# Altium PCB uku20710_com.PcbDoc (part 4 of 4)
Units mm, origin at the board's own origin, x right, y up, seen from the top; angles counter-clockwise.
Board outline 354.7 x 156.7 mm, 2 copper layers (Top Layer, Bottom Layer); 275 components, 514 nets, 980 pads, 578 vias.
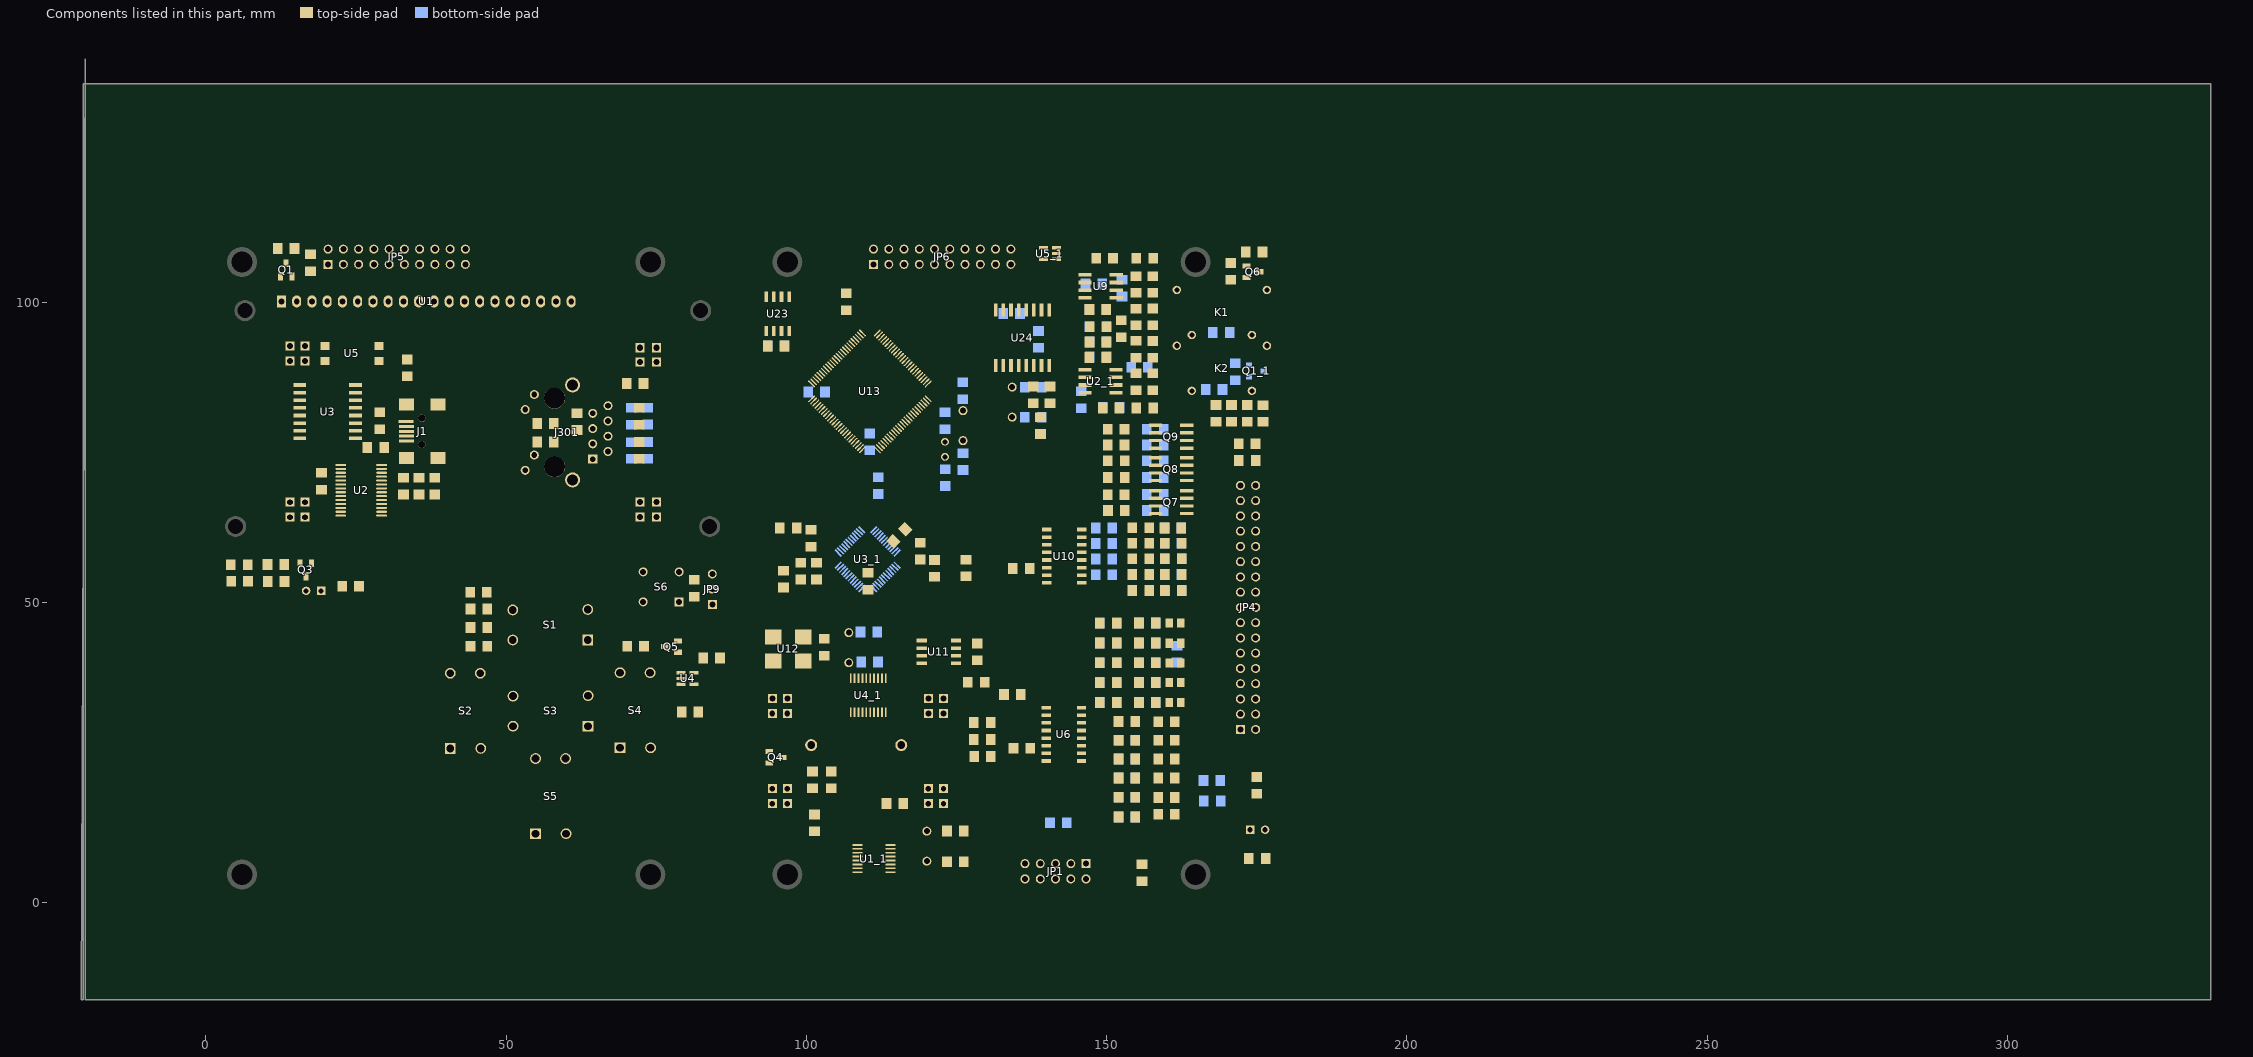
[diagram p4: the components of this part, seen from the top]

## Via types
v1: diameter 1.1, hole 0.6, Top Layer to Bottom Layer, 491 vias
v2: diameter 1.2, hole 0.7, Top Layer to Bottom Layer, 63 vias
v3: diameter 1.5, hole 1, Top Layer to Bottom Layer, 20 vias
v4: diameter 1.27, hole 0.7, Top Layer to Bottom Layer, 3 vias
v5: diameter 1.2, hole 0.6, Top Layer to Bottom Layer, 1 vias

## Nets (pads, with @x,y where several pads share a name; then routed paths per layer and width w, separated by ;. In a path a pad name is that pad's centre, name@x,y a point inside that pad or via, vN(x,y) a via of type N, cw(c..) or ccw(c..) an arc to the next point about the centre after c; other vN are vias at no path point) (continued)
copper on no net: (continued)
  Bottom Layer w0.4: v1@92.447,102.727 92.497,102.727 92.497,102.377 93.473,101.401 98.274,101.401 99.574,102.701 107.424,102.701 108.174,103.451 110.474,103.451 113.324,106.301 113.714,106.301 ; v1(99.275,24.006) 98.825,24.456 98.825,28.857 99.675,29.707 99.675,38.06 v1(99.625,38.11) ; v1(111.078,16.504) v1@111.178,16.604 ; v1@111.178,9.953 111.178,26.757 112.878,28.457 v1(112.878,29.907) ; 123.118,69.389 124.7,69.389 124.972,69.117 124.972,67.427 126.882,65.516 126.882,63.416 126.682,63.216 v1(126.682,59.465) ; v1(126.656,40.761) 127.806,41.912 127.806,43.962 127.506,44.262 127.506,48.763 v1(127.806,49.063) ; v1(126.706,42.762) v1(126.706,50.364) ; v1(130.074,90.201) 141.274,90.201 ; v1(130.724,80.551) 132.874,78.401 132.874,70.519 133.008,70.386 133.008,69.268 132.874,69.135 132.874,63.351 133.374,62.851 133.374,53.831 133.308,53.765 133.308,50.981 133.374,50.914 133.374,44.851 133.824,44.401 133.824,19.901 133.724,19.801 133.724,13.853 137.659,9.919 137.659,5.243 138.941,3.961 ; v1@133.924,64.951 134.274,64.601 134.274,58.903 133.978,58.606 133.978,56.975 134.274,56.679 134.274,53.751 133.948,53.424 133.948,51.424 134.274,51.097 134.274,45.201 134.724,44.751 134.724,22.651 134.574,22.501 134.574,20.801 134.824,20.551 v1(134.824,17.751) ; v1@134.024,66.951 v1(134.074,66.951) 134.074,66.401 134.974,65.501 134.974,58.782 134.558,58.366 134.558,57.215 134.974,56.799 134.974,53.63 134.528,53.184 134.528,51.844 134.974,51.398 134.974,45.651 135.424,45.201 135.424,22.051 v1(135.574,21.901) ; v1@135.974,66.351 136.074,66.251 136.074,59.05 136.808,58.316 136.808,57.315 136.074,56.581 v1@136.074,52.564 ; v1(136.074,68.651) 136.074,70.901 135.774,71.201 135.774,73.251 136.574,74.051 v1(136.574,79.001) ; v1(136.674,105.601) 144.874,105.601 145.424,105.051 152.412,105.051 ; v1@137.324,48.201 v1(137.824,48.201) ; 137.359,53.214 v1(138.259,53.214) ; 138.662,95.207 140.091,95.207 140.384,95.5 ; v1@140.359,96.625 140.359,96.601 140.359,95.525 140.384,95.5 ; 140.409,95.525 140.384,95.5 ; v1@140.424,96.601 140.424,97.151 ; 141.274,90.151 141.324,90.151 142.174,89.301 152.012,89.301 154.024,89.301 154.074,89.251 ; v1@141.674,91.951 141.81,92.086 141.81,94.075 140.384,95.5 ; v1(141.724,47.001) v1(141.724,54.5) ; v1(142.11,28.458) 142.11,27.408 142.81,26.708 142.81,20.887 v1(142.724,20.801) ; v1(142.874,52.714) 142.874,55.78 v1(142.91,55.815) ; v1(143.724,100.851) 144.235,100.851 146.361,102.977 ; v1@145.261,95.925 147.122,95.904 147.722,95.904 ; v1(145.311,93.358) 145.327,93.375 147.172,93.375 147.211,93.375 ; v1(148.124,17.751) v1(148.124,28.501) ; 152.474,105.051 152.424,105.051 ; 152.524,103.751 152.424,103.851 152.424,105.051 ; v1(153.063,105.728) 152.412,105.077 152.412,105.051 ; 154.772,14.251 155.374,14.251 ; 154.772,17.553 155.272,17.553 155.274,17.551 ; 154.772,20.751 155.224,20.751 155.23,20.756 ; 154.772,23.951 155.274,23.951 ; 154.772,27.054 156.66,27.054 v1(156.663,27.058) ; 154.787,23.958 156.657,23.958 v1(156.663,23.951) ; 154.963,20.756 155.23,20.756 ; 155.213,23.957 v1@156.31,23.957 ; 155.263,14.205 v1@156.36,14.205 ; 155.274,20.801 155.23,20.756 ; v1@156.66,20.756 155.23,20.756 ; 169.393,85.522 169.893,85.522 171.968,87.597 173.715,87.597 ; 170.474,94.951 173.77,94.951 174.18,94.541 ; v1(171.024,78.12) 171.024,68.201 172.274,66.951 ; v1(174.574,78.101) 173.518,77.044 173.518,68.248 174.814,66.951 ; 174.814,46.631 176.368,48.185 176.368,80.771 ; 176.065,88.547 176.368,88.243 176.368,80.37 ; 152.412,105.051 152.424,105.051
  Bottom Layer w0.5: v1@115.779,13.753 115.797,13.772 115.797,26.245 ; v1(132.624,101.877) 132.824,102.077 134.508,102.077 135.733,100.851 v1(143.724,100.851) ; 134.274,80.859 136.367,80.859 136.387,80.845 ; 134.274,85.859 136.372,85.859 136.387,85.845 ; v1(138.159,28.658) 138.774,29.274 138.774,44.601 v1(139.024,44.851) ; v1(139.924,19.251) 139.924,25.601 140.424,26.101 141.603,26.101 v1(141.71,26.208) ; v1(141.424,15.951) 141.424,24.272 v1(141.81,24.657) ; v1(142.51,29.959) 142.96,30.409 142.96,31.874 142.374,32.459 142.374,41.151 v1(142.874,41.651) ; v1@142.674,20.851 v1(142.724,20.801) ; v5@143.624,27.658 143.624,29.608 143.86,29.844 143.86,32.409 143.624,32.645 143.624,37.101 v1(144.774,38.251) ; v1@144.024,85.241 145.778,85.241 158.873,85.241 159.273,84.841 160.503,84.841 160.903,85.241 164.18,85.241 ; v1@144.624,22.257 144.624,34.851 v1(144.824,35.051) ; 145.874,98.601 147.074,98.601 147.174,98.701 ; v1(146.537,12.953) 150.638,8.852 v1(150.638,3.951) ; v1@148.161,52.115 v1@148.161,52.213 ; v1@148.162,52.114 148.162,58.858 ; 148.162,59.608 148.162,62.408 ; v1(148.474,84.051) 148.474,83.201 149.224,82.451 149.372,82.451 149.374,82.451 ; 149.972,90.854 150.641,91.524 v1@151.612,91.524 ; 150.962,57.222 151.005,57.265 159.664,57.265 ; 150.962,59.866 151.012,59.916 159.664,59.916 ; 150.962,62.408 150.977,62.423 159.007,62.423 ; 151.012,54.665 159.564,54.665 ; 151.662,36.645 151.672,36.645 151.675,36.645 151.774,36.651 v1(153.513,36.651) 155.37,36.66 154.37,36.66 ; 151.675,33.351 151.681,33.358 v1(153.513,33.358) 155.37,33.36 154.37,33.36 ; 151.675,46.551 151.683,46.56 v1(153.513,46.56) 155.37,46.56 ; 151.679,39.953 151.681,39.951 v1(153.513,39.951) 155.374,39.951 ; 151.679,43.253 151.681,43.251 v1(153.513,43.251) 155.363,43.262 ; v1(152.362,51.964) 152.366,51.961 159.717,51.961 ; 154.863,17.553 155.272,17.553 156.661,17.553 v1(156.663,17.551) ; v1(154.874,65.273) 155.547,65.273 155.574,65.301 155.637,65.295 ; v1@154.874,67.951 155.624,67.951 155.637,67.995 ; v1(154.874,70.795) 155.637,70.795 ; v1(154.874,73.595) 155.637,73.595 ; v1@154.874,78.845 156.587,78.845 ; 155.587,76.245 156.687,76.245 156.874,76.245 ; v1(156.94,12.053) 156.94,7.002 v1(157.44,6.502) ; v1@158.414,51.961 v1(158.414,51.964) ; v1(159.474,101.551) 160.474,100.551 175.19,100.551 176.68,102.041 ; v1(159.674,90.951) 162.174,90.951 162.774,91.551 v1(172.374,91.551) 175.49,91.551 176.68,92.741 ; 161.68,92.741 170.814,92.741 v1(170.824,92.751) ; v1(163.541,18.255) 164.892,16.904 166.171,16.904 ; v1@163.824,33.301 163.974,33.451 164.374,33.851 164.374,36.645 164.374,36.651 v1(164.374,39.951) 164.374,43.245 v1@164.374,46.501 ; 164.374,34.259 164.374,22.173 166.092,20.455 ; 169.093,16.951 170.493,15.551 v1(170.493,15.351) ; 169.093,20.251 170.897,20.251 173.944,17.204 v1(173.944,16.054)
  Bottom Layer w0.6: 150.477,98.648 150.78,98.951 v1(152.274,98.951) v1@152.324,98.951 ; 161.715,39.911 v1(164.374,39.951) ; 164.18,94.541 164.59,94.951 167.674,94.951 167.724,94.951
  Bottom Layer w0.7: 121.672,85.221 127.455,85.221
  Bottom Layer w0.8: 113.679,108.827 113.703,108.852 115.252,110.401 143.863,110.401 v1@144.186,110.078 ; 121.353,82.951 122.053,83.651 ; 127.455,85.221 128.324,84.352 128.324,81.351 127.324,80.351 127.324,77.601 128.356,76.57 ; 128.355,76.569 129.255,75.669 129.255,74.696 129.733,74.219 129.733,72.118 129.283,71.668 129.283,69.567 ; 129.255,69.567 129.255,67.669 130.907,66.018 ; 130.906,66.016 131.556,65.366 131.556,63.116 132.506,62.166 ; 132.415,62.261 132.508,62.168 132.574,62.101 ; 132.557,62.091 132.557,54.265 132.357,54.065 132.357,50.564 132.574,50.347 132.574,20.551 v1(132.574,10.751) ; 137.274,19.051 137.274,16.039 140.282,13.032 141.481,11.833 141.481,6.501 ; 137.324,19.051 137.324,27.492 136.808,28.008 136.808,29.343 137.909,30.443 137.909,33.475 137.324,34.06 137.324,42.501 137.324,56.728 137.588,56.992 137.588,58.639 137.074,59.153 137.074,60.601 137.324,60.851 137.324,67.351 137.324,72.901 v1@143.074,78.651 ; v1(143.41,97.326) 143.41,92.124 v1(144.26,91.274)
  Bottom Layer w1: 113.714,106.301 113.714,108.841 ; v1(143.96,10.654) 143.96,6.503 144.01,6.453 ; 174.764,28.841 174.774,28.851 174.814,28.851
  other v1: 145.271,2 101.472,2.201 106.027,2.201 116.529,2.201 160.29,2.201 169.371,2.201 174.344,2.201 111.128,2.951 152.438,4.651 103.572,4.701 157.971,4.701 171.843,4.701 176.845,4.701 169.343,7.202 160.271,7.252 111.128,8.002 134.334,8.602 139.435,8.802 93.123,8.902 100.775,8.902 121.072,9.402 126.532,9.402 111.228,9.602 166.842,9.702 171.843,9.702 176.871,9.702 146.371,9.802 114.879,11.251 96.774,11.651 108.727,11.753 133.871,12.103 137.771,12.503 115.779,13.653 149.338,13.703 168.693,13.751 93.174,13.851 156.663,14.255 176.845,14.704 135.434,15.751 129.271,16.204 139.471,16.404 171.843,16.804 149.938,17.504 108.472,17.804 117.772,18.805 128.871,19.105 150.038,20.505 138.735,20.551 93.374,21.351 108.272,21.755 146.587,22.151 149.888,23.851 119.33,24.706 124.331,24.706 108.627,26.051 149.588,26.951 177.471,28.957 116.829,29.707 149.338,30.108 101.826,31.251 141.76,31.359 164.115,33.309 128.282,33.408 140.009,33.81 132.583,36.109 145.937,36.651 118.68,38.21 102.172,38.36 177.445,39.051 114.329,39.71 106.827,42.351 166.392,43.511 114.329,44.711 145.971,46.112 102.172,47.012 166.842,47.662 177.595,49.712 110.252,50.464 99.325,51.451 115.729,51.551 120.43,52.313 165.042,53.151 167.742,53.151 158.364,54.665 165.392,57.865 122.531,59.315 177.595,59.715 138.309,59.916 142.935,60.876 118.98,62.051 158.314,62.423 145.887,63.316 113.603,63.767 116.003,64.517 114.853,65.217 161.271,65.316 136.074,66.701 154.874,68.001 169.693,69.617 177.595,69.651 161.271,70.818 102.35,71.269 104.95,71.969 140.836,72.018 104.95,73.269 110.502,73.52 115.572,73.769 120.972,74.469 167.771,74.519 161.271,76.219 154.874,76.251 118.83,76.851 154.874,78.801 146.837,80.32 161.841,82.221 166.142,82.221 159.49,83.521 96.824,84.651 143.71,85.272 94.524,87.922 161.841,89.222 166.171,89.222 96.824,90.451 126.705,90.673 145.737,90.751 93.848,90.874 177.495,91.151 151.662,91.624 141.61,91.874 153.039,92.373 101.326,92.451 133.234,92.451 140.585,93.051 172.293,93.524 159.84,93.674 123.781,95.074 118.603,95.424 145.261,95.875 112.778,96.124 131.483,96.151 172.944,96.451 140.324,96.601 103.972,96.624 165.371,96.624 123.631,97.124 159.771,98.075 97.149,98.201 145.261,98.626 167.842,98.725 118.324,98.801 170.643,99.125 96.124,99.225 102.172,101.375 113.403,102.177 168.292,102.251 92.647,102.777 137.035,103.676 160.071,103.726 142.436,103.826 177.495,103.976 101.876,104.726 106.772,104.726 104.326,107.227 143.336,108.051 106.827,109.678 146.837,109.678 151.838,109.678 160.49,109.678 101.826,109.728 156.84,109.728 177.771,109.828 169.693,110.251
  other v3: 89.95,6.75 89.974,6.751 89.924,6.801 89.95,8.75 89.974,8.751 89.924,8.801 53.5,61.785 55,61.785 36.5,61.8 38,61.8 36.5,95.065 38,95.065 53.5,95.065 55,95.065 89.924,103.201 89.95,103.2 89.874,103.251 89.924,105.201 89.95,105.2 89.874,105.251
  other v5: 143.56,27.658

## Polygon pours and split planes (outlines as drawn)
no net on Top Layer (hatched 90Degree grid 0.1 track 0.3, remove dead copper): 89.022,110.533 89.022,1.9 178.045,1.9 178.045,110.628 89.022,110.628
no net on Top Layer (hatched 90Degree grid 0.1 track 0.3, remove dead copper): 103.652,58.587 103.652,55.737 108.802,50.587 111.652,50.587 116.902,55.837 116.902,58.687 112.002,63.587 108.452,63.587 103.652,58.787
no net on Top Layer (hatched 90Degree grid 0.1 track 0.3, remove dead copper): 103.172,55.538 108.603,50.107 111.851,50.107 117.382,55.638 117.382,58.885 112.201,64.067 108.253,64.067 103.172,58.985
NetC2_1 on Top Layer (hatched 90Degree grid 0.1 track 0.3, remove dead copper): 1.995,108.983 1.995,1.95 87.122,1.95 87.122,110.428 1.9,110.428 1.9,106.395
GND_USB on Top Layer (hatched 90Degree grid 0.1 track 0.3, remove dead copper): 22.556,90.97 22.556,76.62 20.655,74.796 20.605,74.748 20.605,63.566 40.56,63.566 40.56,93.273 22.556,93.273
no net on Bottom Layer (hatched 90Degree grid 0.1 track 0.3, remove dead copper): 89.723,110.878 89.723,1.9 178.045,1.9 178.045,110.595 89.723,110.595
no net on Bottom Layer (hatched 90Degree grid 0.1 track 0.3, remove dead copper): 108.824,73.551 112.324,73.551 122.324,83.551 122.324,86.701 112.274,96.751 108.974,96.751 99.024,86.801 99.024,83.201 108.624,73.601
NetC2_1 on Bottom Layer (hatched 90Degree grid 0.1 track 0.3, remove dead copper): 1.9,110.417 87.122,110.417 87.122,1.95 1.947,1.95 1.947,110.478
GND_USB on Bottom Layer (hatched 90Degree grid 0.1 track 0.3, remove dead copper): 40.86,63.566 20.605,63.566 20.605,74.276 22.556,76.092 22.556,93.273 40.81,93.273 40.81,63.613
NetC2_1 on Bottom Layer (hatched 90Degree grid 0.1 track 0.3, remove dead copper): 20.105,63.066 42.131,63.066 41.31,63.83 41.31,93.773 22.056,93.773 22.056,76.309 20.105,74.493

## Keep-outs
Keep-Out Layer:
  circle w0.25: c12.674,121.301 r0
  circle w0.25: c12.674,121.301 r0
  circle w0.25: c12.674,121.301 r0
  circle w0.25: c12.674,121.301 r0
  circle w0.25: c12.674,121.301 r0
  circle w0.25: c12.674,121.301 r0
  circle w0.25: c12.674,121.301 r0
  circle w0.25: c12.674,121.301 r0
  circle w0.25: c11.8,121.25 r0
  circle w0.25: c11.8,121.25 r0
  circle w0.25: c11.8,121.25 r0
  circle w0.25: c11.8,121.25 r0
  circle w0.25: c11.8,121.25 r0
  circle w0.25: c11.8,121.25 r0
  circle w0.25: c11.8,121.25 r0
  circle w0.25: c11.8,121.25 r0
  circle w0.25: c16.175,121.251 r0
  circle w0.25: c16.175,121.251 r0
  circle w0.25: c16.175,121.251 r0
  circle w0.25: c16.175,121.251 r0
  circle w0.25: c16.175,121.251 r0
  circle w0.25: c16.175,121.251 r0
  circle w0.25: c16.175,121.251 r0
  circle w0.25: c16.175,121.251 r0
  lines w0.2: 40.81,62.8 40.86,62.85
  lines w0.25: 10.256,60.815 34.5,60.815 ; 10.3,60.8 10.3,95.55 ; 10.3,60.85 10.35,60.8 ; 10.3,95.4 10.3,96.05 ; 10.35,96.05 34.5,96.05 ; 12.3,62.9 12.3,64.15 ; 12.35,94.05 34.5,94.05 ; 12.353,94.024 12.3,93.971 12.3,81.671 13.253,80.717 13.253,69.12 12.3,68.167 12.3,62.8 34.5,62.8 ; 18,48 33.75,48 33.75,8.9 2.25,8.9 2.25,48 18.05,48 ; 34.5,60.82 ccw(c34.5,61.82) 34.5,62.82 ; 34.5,94.045 ccw(c34.5,95.045) 34.5,96.045 ; 40,60.8 51.5,60.8 ; 40,60.82 cw(c40,61.82) 40,62.82 ; 40,62.8 40.96,62.8 ; 40,94.045 cw(c40,95.045) 40,96.045 ; 40,94.05 41,94.05 ; 40,96.05 51.5,96.05 ; 40.96,62.816 40.96,94.05 ; 50.5,62.816 50.5,94.05 ; 50.516,62.8 51.5,62.8 ; 51.5,60.805 ccw(c51.5,61.805) 51.5,62.805 ; 51.5,94.045 ccw(c51.5,95.045) 51.5,96.045 ; 57,60.805 cw(c57,61.805) 57,62.805 ; 57,60.815 78.864,60.815 ; 57,62.8 76.5,62.8 76.5,94 ; 57,94.045 cw(c57,95.045) 57,96.045 ; 57,94.05 76.491,94.05 ; 57,96.05 78.849,96.05 ; 78.8,60.8 78.85,60.85 ; 78.85,60.8 78.85,96.05 ; 88.915,101.249 cw(c89.874,101.201) 90.833,101.254 ; 88.915,107.298 ccw(c89.874,107.351) 90.834,107.303 ; 88.965,4.799 cw(c89.924,4.751) 90.883,4.804 ; 88.965,10.848 ccw(c89.924,10.901) 90.883,10.853 ; 88.991,4.748 cw(c89.95,4.7) 90.909,4.753 ; 88.991,10.797 ccw(c89.95,10.85) 90.909,10.802 ; 88.991,101.198 cw(c89.95,101.15) 90.909,101.203 ; 88.991,107.247 ccw(c89.95,107.3) 90.91,107.252 ; 89,4.95 89,0 0,0 0,112.4 89,112.4 ; 89,10.7 89,101.5 ; 89.022,107.028 89.022,112.378 ; 90.824,5.001 90.824,0.001 179.824,0.001 179.824,5.001 ; 90.824,10.601 90.824,101.301 ; 90.824,107.3 90.824,112.451 179.824,112.451 ; 179.824,4.701 179.824,112.351 ; 179.824,10.701 179.824,101.501 ; 40.3,96.05 40.3,96.05 ; 41.961,96.05 41.961,96.05
  lines w0.254: 50.5,94.05 51.5,94.05

## Other copper
Top Layer:
  text "2071x" at 66.417,63.616 h0.6

## Silkscreen, mask and mechanical layers (free items; w line width, h text height)
Top Overlay:
  circle w0.254: c99.375,43.861 r0.51
Mechanical 1:
  lines w0.25: 85.121,4.651 96.874,4.651 ; 146.524,2.861 148.364,4.701 164.824,4.701
Mechanical 5:
  circle w0.254: c121.072,9.402 r0.4
  circle w0.254: c100.775,8.902 r0.3
  circle w0.254: c101.472,2.201 r0.3
  circle w0.254: c103.572,4.701 r0.3
  circle w0.254: c106.027,2.201 r0.304
  circle w0.254: c116.529,2.201 r0.3
  circle w0.254: c111.128,8.002 r0.3
  circle w0.254: c111.128,2.951 r0.305
  circle w0.254: c105.801,6.753 r0.352
  circle w0.254: c105,8.003 r0.252
  circle w0.254: c103.35,9.203 r0.311
  circle w0.254: c120.054,11.911 r0.409
  circle w0.254: c120.054,6.911 r0.36
  circle w0.254: c120.104,6.861 r0.36
  circle w0.254: c120.104,11.861 r0.409
  circle w0.254: c103.4,9.153 r0.311
  circle w0.254: c105.05,7.953 r0.252
  circle w0.254: c105.851,6.703 r0.352
  circle w0.254: c111.178,2.901 r0.305
  circle w0.254: c111.178,7.952 r0.3
  circle w0.254: c116.579,2.151 r0.3
  circle w0.254: c106.077,2.151 r0.304
  circle w0.254: c103.622,4.651 r0.3
  circle w0.254: c101.522,2.151 r0.3
  circle w0.254: c100.825,8.852 r0.3
  circle w0.254: c121.121,9.352 r0.4
  lines w0.2: 100.725,14.404 121.731,14.404 ; 100.775,14.354 121.781,14.354 ; 101.326,-2.551 101.326,10.002 ; 101.376,-2.601 101.376,9.953 ; 104.026,0 121.481,0 121.531,-0.05 ; 104.076,-0.05 121.531,-0.05 ; 121.581,-0.1 121.531,-0.05

## Text inside footprints (layer, text, board x,y; h text height)
JP1: Top Overlay "2" at 149.101,4.469 h1 r180; Top Overlay "1" at 148.593,7.009 h1 r180; Top Overlay "9" at 134.877,7.009 h1 r180; Top Overlay "10" at 134.877,4.469 h1 r180
JP5: Top Overlay "2" at 17.81,108.332 h0.6; Top Overlay "1" at 17.81,105.792 h0.6; Top Overlay "19" at 44.734,105.792 h0.6; Top Overlay "20" at 44.734,108.332 h0.6
JP6: Top Overlay "2" at 108.634,108.333 h1; Top Overlay "1" at 108.634,105.793 h1; Top Overlay "19" at 135.558,105.793 h1; Top Overlay "20" at 135.558,108.333 h1